# Altium PCB PCB1.PcbDoc
Units mm, origin at the board's own origin, x right, y up, seen from the top; angles counter-clockwise.
Board outline 102 x 99.82 mm, 2 copper layers (Top Layer, Bottom Layer); 155 components, 19 nets, 399 pads, 0 vias.
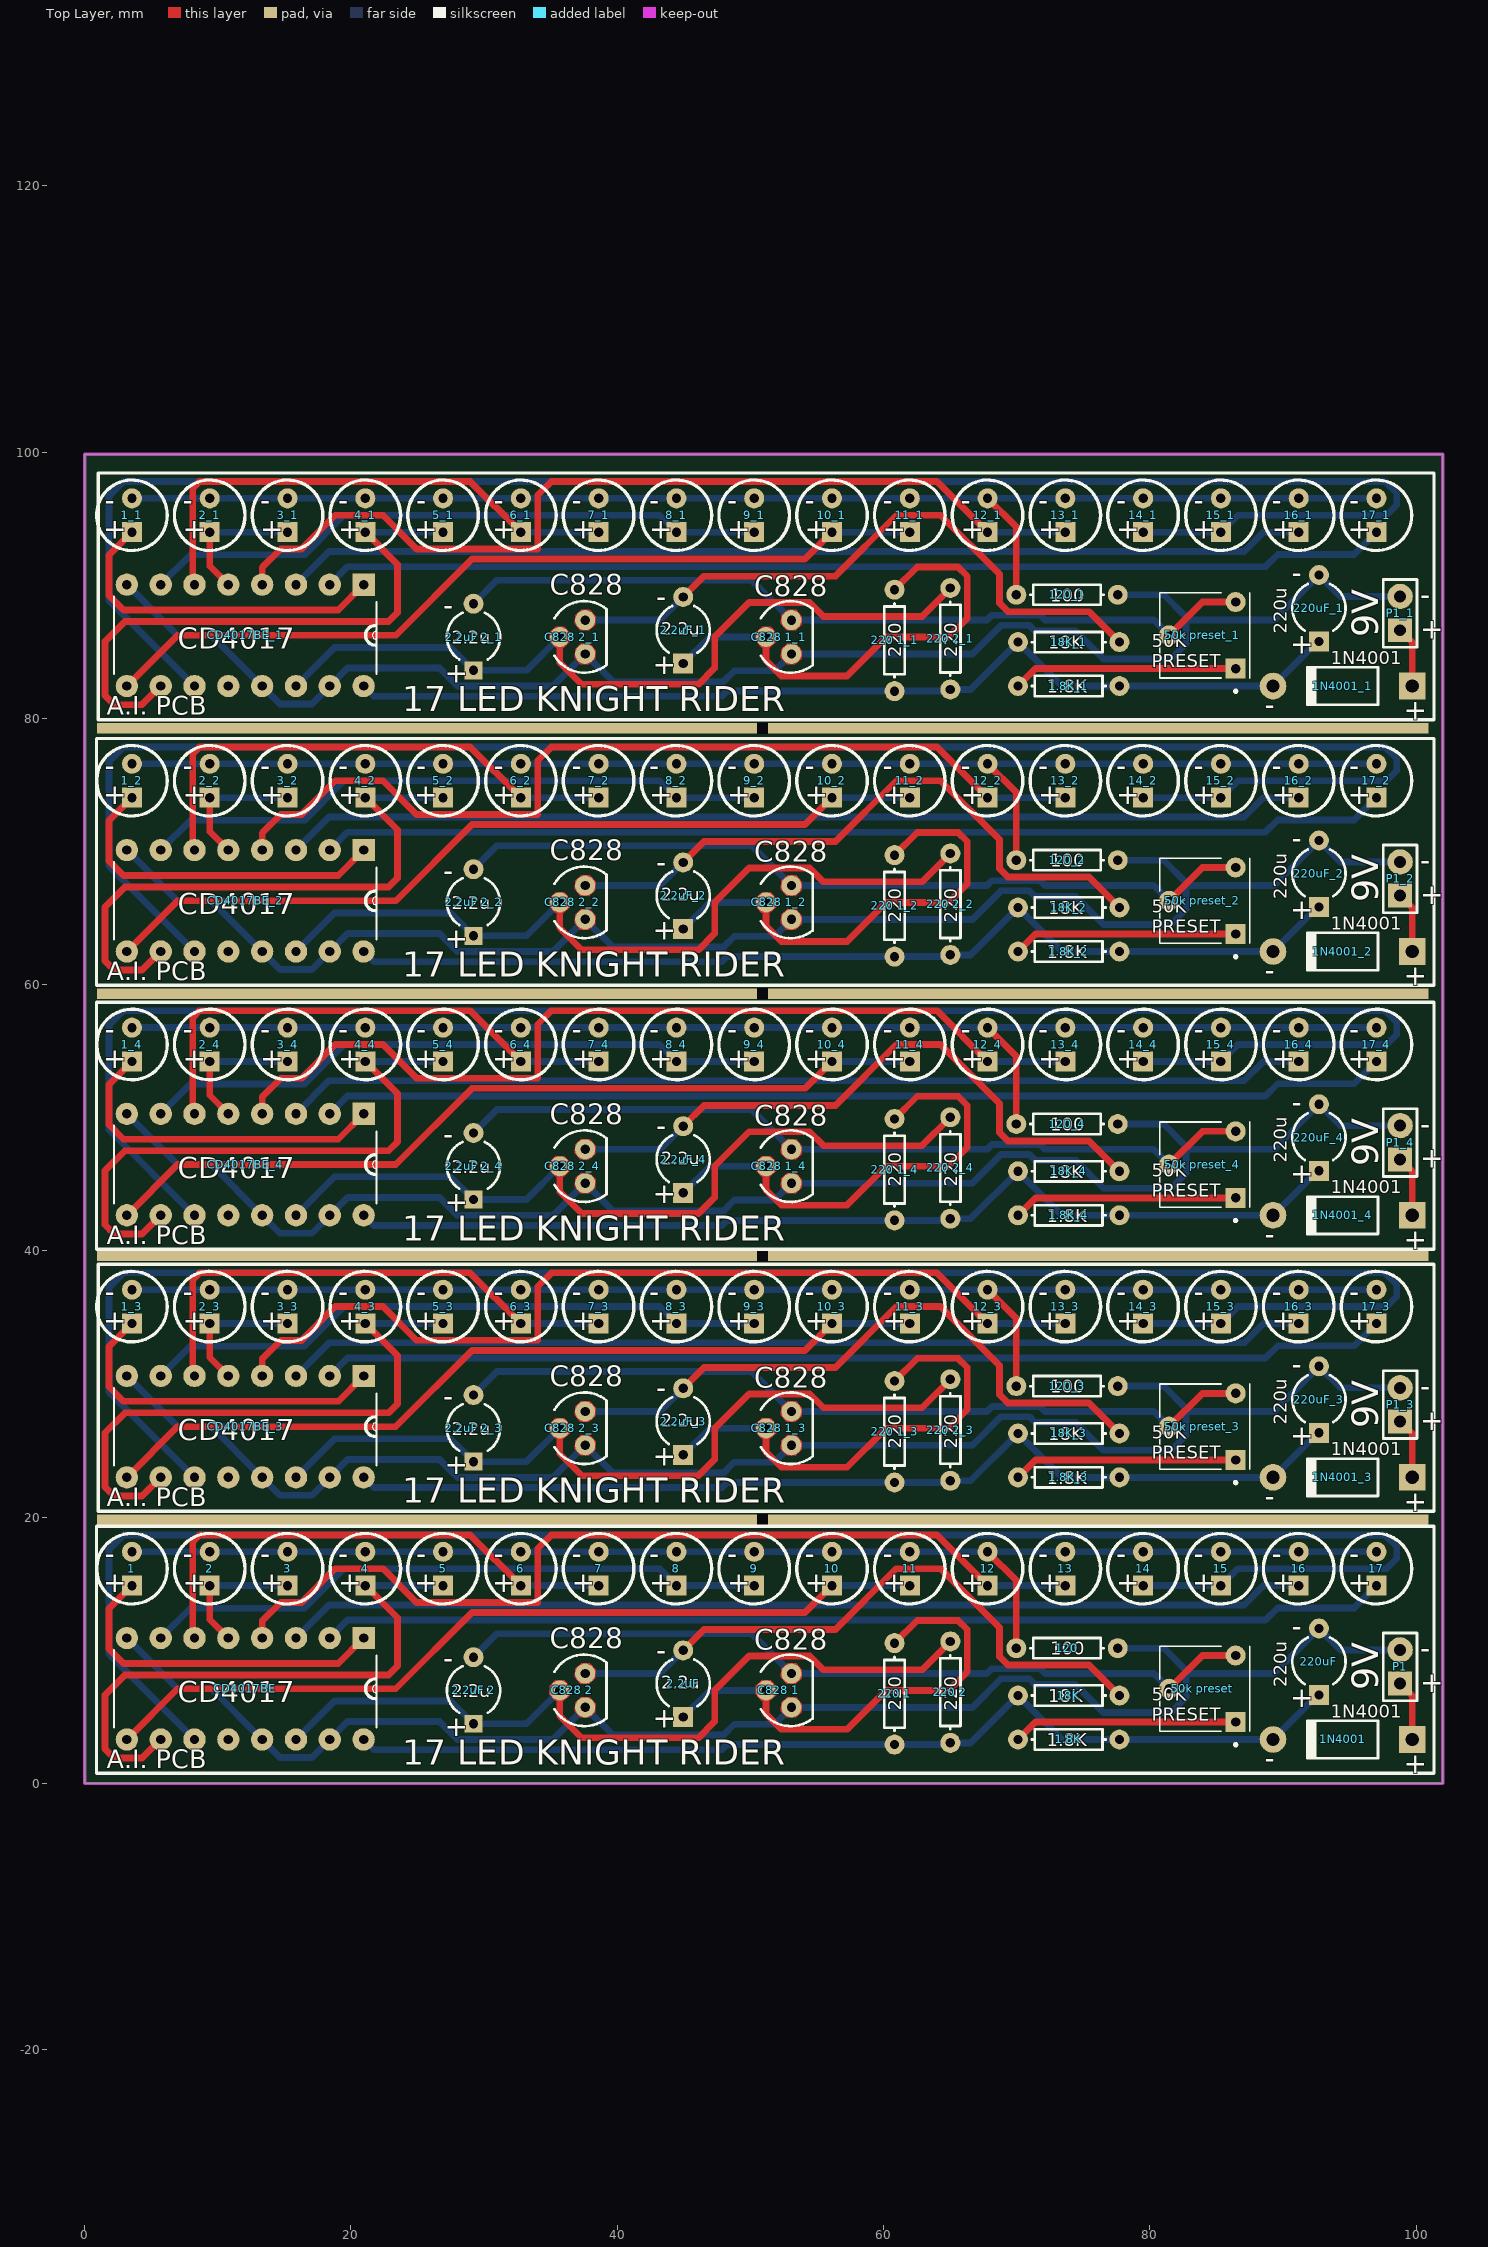
[diagram p0: Top Layer view]
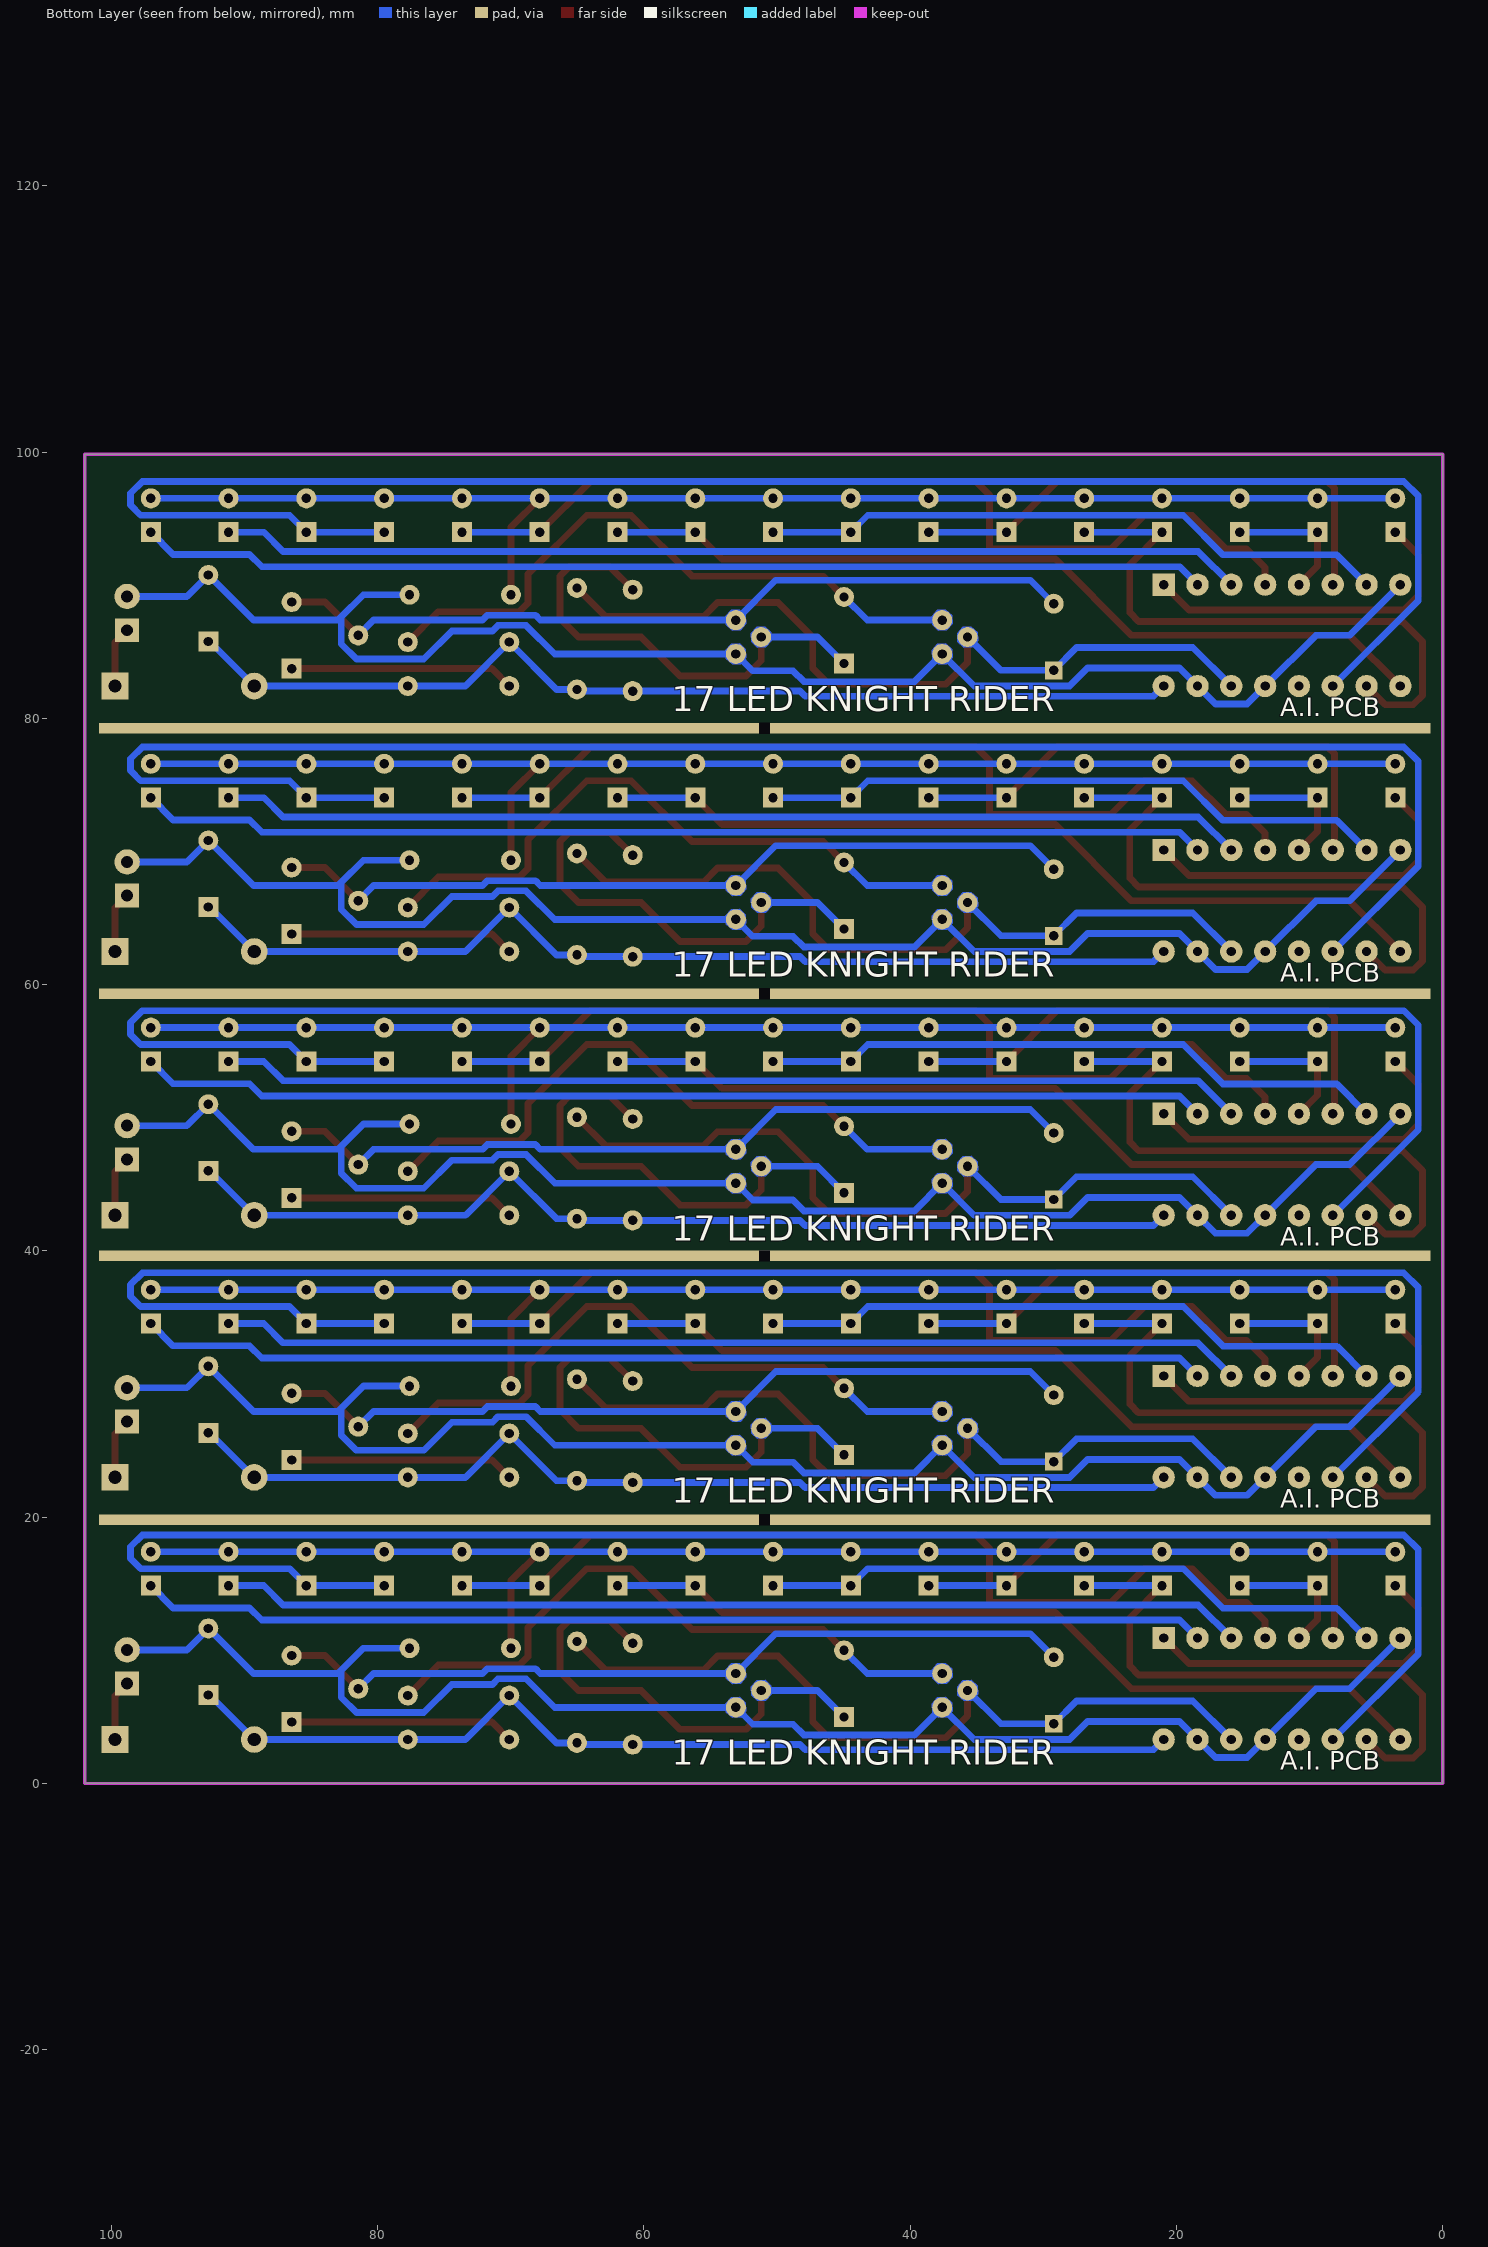
[diagram p1: Bottom Layer view, seen from below]

## Layer stack, top to bottom
Top Solder: solder mask 0.0102, Solder Resist, Dk 3.5
Top Layer: signal copper 0.0356
Dielectric 1: dielectric 0.32, FR-4, Dk 4.8
Bottom Layer: signal copper 0.0356
Bottom Solder: solder mask 0.0102, Solder Resist, Dk 3.5

## Board outline
0,0 0,99.822 102,99.822 102,0

## Design rules (kind name [scope] priority, off if disabled: settings)
Clearance [All] p1: gap=0.254 ignorepadtopadclearanceinfootprint=FALSE except(0: Arc-Hole Track-Hole SMDPad-Hole THPad-Hole Via-Hole Fill-Hole Poly-Hole Region-Hole Text-Hole)
PolygonConnect [All] p1: connectstyle=Relief reliefconductorwidth=0.254 reliefentries=4 polygonreliefangle="90 Angle" airgapwidth=0.254
RoutingVias [All] p1: holewidth=0.711 width=1.27 viastyle="Through Hole" minholewidth=0.711 minwidth=1.27 maxholewidth=0.711 maxwidth=1.27
SolderMaskExpansion [All] p1: expansion=0.102
Width [All] p1: maxlimit=0.762 minlimit=0.254 preferedwidth=0.508
30 further rules are at their usual default settings.

## Classes and differential pairs
component class Sheet1: 1 1.8K 1N4001 2 2.2uF "2.2uF 2" 3 4 5 6 7 8 9 10 11 12 13 14 15 16 17 18K "50k preset" 120 220 "220 1" "220 2" 220uF C828 "C828 1" "C828 2" CD4017BE P1 Q1 Q?

## Components (designator, comment, footprint, x,y, rotation, side; value= is the part's Value field where it differs from the comment)
1 "L-53GD" L-53GD 3.556,16.129 r90 top
1.8K "" AXIAL-0.3 73.914,3.302 r0 top value=1.8K
1.8K_1 "" AXIAL-0.3 73.914,82.423 r0 top value=1.8K (schematic designator 1.8K)
1.8K_2 "" AXIAL-0.3 73.914,62.484 r0 top value=1.8K (schematic designator 1.8K)
1.8K_3 "" AXIAL-0.3 73.914,22.987 r0 top value=1.8K (schematic designator 1.8K)
1.8K_4 "" AXIAL-0.3 73.914,42.672 r0 top value=1.8K (schematic designator 1.8K)
1_1 "L-53GD" L-53GD 3.556,95.25 r90 top (schematic designator 1)
1_2 "L-53GD" L-53GD 3.556,75.311 r90 top (schematic designator 1)
1_3 "L-53GD" L-53GD 3.556,35.814 r90 top (schematic designator 1)
1_4 "L-53GD" L-53GD 3.556,55.499 r90 top (schematic designator 1)
1N4001 "" DO-41 94.488,3.302 r180 top
1N4001_1 "" DO-41 94.488,82.423 r180 top (schematic designator 1N4001)
1N4001_2 "" DO-41 94.488,62.484 r180 top (schematic designator 1N4001)
1N4001_3 "" DO-41 94.488,22.987 r180 top (schematic designator 1N4001)
1N4001_4 "" DO-41 94.488,42.672 r180 top (schematic designator 1N4001)
2 "L-53GD" L-53GD 9.398,16.129 r90 top
2.2uF "" CAPR5-4X5#1 44.958,7.493 r90 top value="2.2uF 1"
"2.2uF 2" "" CAPR5-4X5#2 29.21,6.985 r90 top value=2.2uF
"2.2uF 2_1" "" CAPR5-4X5#2 29.21,86.106 r90 top value=2.2uF (schematic designator "2.2uF 2")
"2.2uF 2_2" "" CAPR5-4X5#2 29.21,66.167 r90 top value=2.2uF (schematic designator "2.2uF 2")
"2.2uF 2_3" "" CAPR5-4X5#2 29.21,26.67 r90 top value=2.2uF (schematic designator "2.2uF 2")
"2.2uF 2_4" "" CAPR5-4X5#2 29.21,46.355 r90 top value=2.2uF (schematic designator "2.2uF 2")
2.2uF_1 "" CAPR5-4X5#1 44.958,86.614 r90 top value="2.2uF 1" (schematic designator 2.2uF)
2.2uF_2 "" CAPR5-4X5#1 44.958,66.675 r90 top value="2.2uF 1" (schematic designator 2.2uF)
2.2uF_3 "" CAPR5-4X5#1 44.958,27.178 r90 top value="2.2uF 1" (schematic designator 2.2uF)
2.2uF_4 "" CAPR5-4X5#1 44.958,46.863 r90 top value="2.2uF 1" (schematic designator 2.2uF)
2_1 "L-53GD" L-53GD 9.398,95.25 r90 top (schematic designator 2)
2_2 "L-53GD" L-53GD 9.398,75.311 r90 top (schematic designator 2)
2_3 "L-53GD" L-53GD 9.398,35.814 r90 top (schematic designator 2)
2_4 "L-53GD" L-53GD 9.398,55.499 r90 top (schematic designator 2)
3 "L-53GD" L-53GD 15.24,16.129 r90 top
3_1 "L-53GD" L-53GD 15.24,95.25 r90 top (schematic designator 3)
3_2 "L-53GD" L-53GD 15.24,75.311 r90 top (schematic designator 3)
3_3 "L-53GD" L-53GD 15.24,35.814 r90 top (schematic designator 3)
3_4 "L-53GD" L-53GD 15.24,55.499 r90 top (schematic designator 3)
4 "L-53GD" L-53GD 21.082,16.129 r90 top
4_1 "L-53GD" L-53GD 21.082,95.25 r90 top (schematic designator 4)
4_2 "L-53GD" L-53GD 21.082,75.311 r90 top (schematic designator 4)
4_3 "L-53GD" L-53GD 21.082,35.814 r90 top (schematic designator 4)
4_4 "L-53GD" L-53GD 21.082,55.499 r90 top (schematic designator 4)
5 "L-53GD" L-53GD 26.924,16.129 r90 top
5_1 "L-53GD" L-53GD 26.924,95.25 r90 top (schematic designator 5)
5_2 "L-53GD" L-53GD 26.924,75.311 r90 top (schematic designator 5)
5_3 "L-53GD" L-53GD 26.924,35.814 r90 top (schematic designator 5)
5_4 "L-53GD" L-53GD 26.924,55.499 r90 top (schematic designator 5)
6 "L-53GD" L-53GD 32.766,16.129 r90 top
6_1 "L-53GD" L-53GD 32.766,95.25 r90 top (schematic designator 6)
6_2 "L-53GD" L-53GD 32.766,75.311 r90 top (schematic designator 6)
6_3 "L-53GD" L-53GD 32.766,35.814 r90 top (schematic designator 6)
6_4 "L-53GD" L-53GD 32.766,55.499 r90 top (schematic designator 6)
7 "L-53GD" L-53GD 38.608,16.129 r90 top
7_1 "L-53GD" L-53GD 38.608,95.25 r90 top (schematic designator 7)
7_2 "L-53GD" L-53GD 38.608,75.311 r90 top (schematic designator 7)
7_3 "L-53GD" L-53GD 38.608,35.814 r90 top (schematic designator 7)
7_4 "L-53GD" L-53GD 38.608,55.499 r90 top (schematic designator 7)
8 "L-53GD" L-53GD 44.45,16.129 r90 top
8_1 "L-53GD" L-53GD 44.45,95.25 r90 top (schematic designator 8)
8_2 "L-53GD" L-53GD 44.45,75.311 r90 top (schematic designator 8)
8_3 "L-53GD" L-53GD 44.45,35.814 r90 top (schematic designator 8)
8_4 "L-53GD" L-53GD 44.45,55.499 r90 top (schematic designator 8)
9 "L-53GD" L-53GD 50.292,16.129 r90 top
9_1 "L-53GD" L-53GD 50.292,95.25 r90 top (schematic designator 9)
9_2 "L-53GD" L-53GD 50.292,75.311 r90 top (schematic designator 9)
9_3 "L-53GD" L-53GD 50.292,35.814 r90 top (schematic designator 9)
9_4 "L-53GD" L-53GD 50.292,55.499 r90 top (schematic designator 9)
10 "L-53GD" L-53GD 56.134,16.129 r90 top
10_1 "L-53GD" L-53GD 56.134,95.25 r90 top (schematic designator 10)
10_2 "L-53GD" L-53GD 56.134,75.311 r90 top (schematic designator 10)
10_3 "L-53GD" L-53GD 56.134,35.814 r90 top (schematic designator 10)
10_4 "L-53GD" L-53GD 56.134,55.499 r90 top (schematic designator 10)
11 "L-53GD" L-53GD 61.976,16.129 r90 top
11_1 "L-53GD" L-53GD 61.976,95.25 r90 top (schematic designator 11)
11_2 "L-53GD" L-53GD 61.976,75.311 r90 top (schematic designator 11)
11_3 "L-53GD" L-53GD 61.976,35.814 r90 top (schematic designator 11)
11_4 "L-53GD" L-53GD 61.976,55.499 r90 top (schematic designator 11)
12 "L-53GD" L-53GD 67.818,16.129 r90 top
12_1 "L-53GD" L-53GD 67.818,95.25 r90 top (schematic designator 12)
12_2 "L-53GD" L-53GD 67.818,75.311 r90 top (schematic designator 12)
12_3 "L-53GD" L-53GD 67.818,35.814 r90 top (schematic designator 12)
12_4 "L-53GD" L-53GD 67.818,55.499 r90 top (schematic designator 12)
13 "L-53GD" L-53GD 73.66,16.129 r90 top
13_1 "L-53GD" L-53GD 73.66,95.25 r90 top (schematic designator 13)
13_2 "L-53GD" L-53GD 73.66,75.311 r90 top (schematic designator 13)
13_3 "L-53GD" L-53GD 73.66,35.814 r90 top (schematic designator 13)
13_4 "L-53GD" L-53GD 73.66,55.499 r90 top (schematic designator 13)
14 "L-53GD" L-53GD 79.502,16.129 r90 top
14_1 "L-53GD" L-53GD 79.502,95.25 r90 top (schematic designator 14)
14_2 "L-53GD" L-53GD 79.502,75.311 r90 top (schematic designator 14)
14_3 "L-53GD" L-53GD 79.502,35.814 r90 top (schematic designator 14)
14_4 "L-53GD" L-53GD 79.502,55.499 r90 top (schematic designator 14)
15 "L-53GD" L-53GD 85.344,16.129 r90 top
15_1 "L-53GD" L-53GD 85.344,95.25 r90 top (schematic designator 15)
15_2 "L-53GD" L-53GD 85.344,75.311 r90 top (schematic designator 15)
15_3 "L-53GD" L-53GD 85.344,35.814 r90 top (schematic designator 15)
15_4 "L-53GD" L-53GD 85.344,55.499 r90 top (schematic designator 15)
16 "L-53GD" L-53GD 91.186,16.129 r90 top
16_1 "L-53GD" L-53GD 91.186,95.25 r90 top (schematic designator 16)
16_2 "L-53GD" L-53GD 91.186,75.311 r90 top (schematic designator 16)
16_3 "L-53GD" L-53GD 91.186,35.814 r90 top (schematic designator 16)
16_4 "L-53GD" L-53GD 91.186,55.499 r90 top (schematic designator 16)
17 "L-53GD" L-53GD 97.028,16.129 r90 top
17_1 "L-53GD" L-53GD 97.028,95.25 r90 top (schematic designator 17)
17_2 "L-53GD" L-53GD 97.028,75.311 r90 top (schematic designator 17)
17_3 "L-53GD" L-53GD 97.028,35.814 r90 top (schematic designator 17)
17_4 "L-53GD" L-53GD 97.028,55.499 r90 top (schematic designator 17)
18K "" AXIAL-0.3 73.914,6.604 r180 top value=18K
18K_1 "" AXIAL-0.3 73.914,85.725 r180 top value=18K (schematic designator 18K)
18K_2 "" AXIAL-0.3 73.914,65.786 r180 top value=18K (schematic designator 18K)
18K_3 "" AXIAL-0.3 73.914,26.289 r180 top value=18K (schematic designator 18K)
18K_4 "" AXIAL-0.3 73.914,45.974 r180 top value=18K (schematic designator 18K)
"50k preset" "50K" *TRIM_EVN-D8AA03B14 83.947,7.112 r90 top
"50k preset_1" "50K" *TRIM_EVN-D8AA03B14 83.947,86.233 r90 top (schematic designator "50k preset")
"50k preset_2" "50K" *TRIM_EVN-D8AA03B14 83.947,66.294 r90 top (schematic designator "50k preset")
"50k preset_3" "50K" *TRIM_EVN-D8AA03B14 83.947,26.797 r90 top (schematic designator "50k preset")
"50k preset_4" "50K" *TRIM_EVN-D8AA03B14 83.947,46.482 r90 top (schematic designator "50k preset")
120 "" AXIAL-0.3 73.787,10.16 r0 top value=220
120_1 "" AXIAL-0.3 73.787,89.281 r0 top value=220 (schematic designator 120)
120_2 "" AXIAL-0.3 73.787,69.342 r0 top value=220 (schematic designator 120)
120_3 "" AXIAL-0.3 73.787,29.845 r0 top value=220 (schematic designator 120)
120_4 "" AXIAL-0.3 73.787,49.53 r0 top value=220 (schematic designator 120)
"220 1" "" AXIAL-0.3 60.833,6.731 r270 top value=220
"220 1_1" "" AXIAL-0.3 60.833,85.852 r270 top value=220 (schematic designator "220 1")
"220 1_2" "" AXIAL-0.3 60.833,65.913 r270 top value=220 (schematic designator "220 1")
"220 1_3" "" AXIAL-0.3 60.833,26.416 r270 top value=220 (schematic designator "220 1")
"220 1_4" "" AXIAL-0.3 60.833,46.101 r270 top value=220 (schematic designator "220 1")
"220 2" "" AXIAL-0.3 65.024,6.858 r90 top value=220
"220 2_1" "" AXIAL-0.3 65.024,85.979 r90 top value=220 (schematic designator "220 2")
"220 2_2" "" AXIAL-0.3 65.024,66.04 r90 top value=220 (schematic designator "220 2")
"220 2_3" "" AXIAL-0.3 65.024,26.543 r90 top value=220 (schematic designator "220 2")
"220 2_4" "" AXIAL-0.3 65.024,46.228 r90 top value=220 (schematic designator "220 2")
220uF "" CAPR5-4X5#1 92.71,9.144 r90 top value=100pF
220uF_1 "" CAPR5-4X5#1 92.71,88.265 r90 top value=100pF (schematic designator 220uF)
220uF_2 "" CAPR5-4X5#1 92.71,68.326 r90 top value=100pF (schematic designator 220uF)
220uF_3 "" CAPR5-4X5#1 92.71,28.829 r90 top value=100pF (schematic designator 220uF)
220uF_4 "" CAPR5-4X5#1 92.71,48.514 r90 top value=100pF (schematic designator 220uF)
"C828 1" "P2N2222A" *TO92 53.086,6.985 r90 top
"C828 1_1" "P2N2222A" *TO92 53.086,86.106 r90 top (schematic designator "C828 1")
"C828 1_2" "P2N2222A" *TO92 53.086,66.167 r90 top (schematic designator "C828 1")
"C828 1_3" "P2N2222A" *TO92 53.086,26.67 r90 top (schematic designator "C828 1")
"C828 1_4" "P2N2222A" *TO92 53.086,46.355 r90 top (schematic designator "C828 1")
"C828 2" "P2N2222A" *TO92 37.592,6.985 r90 top
"C828 2_1" "P2N2222A" *TO92 37.592,86.106 r90 top (schematic designator "C828 2")
"C828 2_2" "P2N2222A" *TO92 37.592,66.167 r90 top (schematic designator "C828 2")
"C828 2_3" "P2N2222A" *TO92 37.592,26.67 r90 top (schematic designator "C828 2")
"C828 2_4" "P2N2222A" *TO92 37.592,46.355 r90 top (schematic designator "C828 2")
CD4017BE "CD4017BE" *DIP254P762X508-16 3.175,3.302 r270 top
CD4017BE_1 "CD4017BE" *DIP254P762X508-16 3.175,82.423 r270 top (schematic designator CD4017BE)
CD4017BE_2 "CD4017BE" *DIP254P762X508-16 3.175,62.484 r270 top (schematic designator CD4017BE)
CD4017BE_3 "CD4017BE" *DIP254P762X508-16 3.175,22.987 r270 top (schematic designator CD4017BE)
CD4017BE_4 "CD4017BE" *DIP254P762X508-16 3.175,42.672 r270 top (schematic designator CD4017BE)
P1 "" HDR1X2 98.806,7.493 r90 top
P1_1 "" HDR1X2 98.806,86.614 r90 top (schematic designator P1)
P1_2 "" HDR1X2 98.806,66.675 r90 top (schematic designator P1)
P1_3 "" HDR1X2 98.806,27.178 r90 top (schematic designator P1)
P1_4 "" HDR1X2 98.806,46.863 r90 top (schematic designator P1)

## Footprints (in the part's own frame and the unit in brackets; to place one, negate y for a bottom-side part, rotate by r counter-clockwise, add the part's x,y. Pads: shape width x height; smd on the part's side, far side on the other; paste and mask are expansions set on the pad)
*DIP254P762X508-16 [mil]
  rect 66x66 hole 27.56: 1(-300,700)
  round 66 hole 27.56: 2(-300,600) 3(-300,500) 4(-300,400) 5(-300,300) 6(-300,200) 7(-300,100) 8(-300,0) 9(0,0) 10(0,100) 11(0,200) 12(0,300) 13(0,400) 14(0,500) 15(0,600) 16(0,700)
  silkscreen extent -265,-38 -35,738
*TO92 [mm]
  round 1.5 hole 0.7: 1(1.27,0) 2(0,1.905) 3(-1.27,0)
  Top Layer region: 2.058,0.287 1.624,0.76 0.983,0.788 0.51,0.354 0.482,-0.287 0.916,-0.76 1.557,-0.788 2.03,-0.354
  Top Layer region: 0.788,2.192 0.354,2.665 -0.287,2.693 -0.76,2.259 -0.788,1.618 -0.354,1.145 0.287,1.117 0.76,1.551
  Top Layer region: -0.482,0.287 -0.916,0.76 -1.557,0.788 -2.03,0.354 -2.058,-0.287 -1.624,-0.76 -0.983,-0.788 -0.51,-0.354
  Bottom Layer region: 2.058,0.287 1.624,0.76 0.983,0.788 0.51,0.354 0.482,-0.287 0.916,-0.76 1.557,-0.788 2.03,-0.354
  Bottom Layer region: 0.788,2.192 0.354,2.665 -0.287,2.693 -0.76,2.259 -0.788,1.618 -0.354,1.145 0.287,1.117 0.76,1.551
  Bottom Layer region: -0.482,0.287 -0.916,0.76 -1.557,0.788 -2.03,0.354 -2.058,-0.287 -1.624,-0.76 -0.983,-0.788 -0.51,-0.354
  Multi-Layer region: 2.058,0.287 1.624,0.76 0.983,0.788 0.51,0.354 0.482,-0.287 0.916,-0.76 1.557,-0.788 2.03,-0.354
  Multi-Layer region: 0.788,2.192 0.354,2.665 -0.287,2.693 -0.76,2.259 -0.788,1.618 -0.354,1.145 0.287,1.117 0.76,1.551
  Multi-Layer region: -0.482,0.287 -0.916,0.76 -1.557,0.788 -2.03,0.354 -2.058,-0.287 -1.624,-0.76 -0.983,-0.788 -0.51,-0.354
  silkscreen extent -2.68,-1.61 2.7,2.3
*TRIM_EVN-D8AA03B14 [mm]
  rect 1.508x1.508 hole 0.7: 1(-2.5,-2.5)
  round 1.508 hole 0.7: 2(0,2.5) 3(2.5,-2.5)
  silkscreen extent -4.3,-3.57 3.2,3.2
AXIAL-0.3 [mm] "Axial Device, Thru-Hole; 2 Leads; 0.3 in Pin Spacing"
  round 1.5 hole 0.7: 1(-3.81,0) 2(3.81,0)
  silkscreen extent -2.77,-0.76 2.77,0.76
CAPR5-4X5#1 [mm] "Capacitor; 2 Leads"
  rect 1.5x1.5 hole 0.7: 1(-2.5,0)
  round 1.5 hole 0.7: 2(2.5,0)
  silkscreen extent -1.69,-2 1.82,2
CAPR5-4X5#2 [mm] "Capacitor; 2 Leads"
  rect 1.35x1.35 hole 0.7: 1(-2.5,0)
  round 1.5 hole 0.7: 2(2.5,0)
  silkscreen extent -1.69,-2 1.82,2
DO-41 [mm] "Diode, Axial; Body 5.2 x 2.7 mm (LxDia. max), Lead Dia. 0.86 mm (max)"
  rect 2x2 hole 1: 1(-5.23,0)
  round 2 hole 1: 2(5.23,0)
  silkscreen extent -2.65,-1.4 2.75,1.4
HDR1X2 [mm] "Connector; Header; 2 Position"
  rect 1.8x1.8 hole 0.9: 1(0,0)
  round 1.9 hole 0.9: 2(2.54,0)
  silkscreen extent -1.27,-1.27 3.81,1.27
L-53GD [mm]
  rect 1.5x1.5 hole 0.7: 1(-1.27,0)
  round 1.5 hole 0.7: 2(1.27,0)
  silkscreen extent -2.65,-2.65 2.65,2.65

## Part data
1 1_1 1_2 1_3 1_4 2 2_1 2_2 2_3 2_4 3 3_1 3_2 3_3 3_4 4 4_1 4_2 4_3 4_4 5 5_1 5_2 5_3 5_4 6 6_1 6_2 6_3 6_4 7 7_1 7_2 7_3 7_4 8 8_1 8_2 8_3 8_4 9 9_1 9_2 9_3 9_4 10 10_1 10_2 10_3 10_4 11 11_1 11_2 11_3 11_4 12 12_1 12_2 12_3 12_4 13 13_1 13_2 13_3 13_4 14 14_1 14_2 14_3 14_4 15 15_1 15_2 15_3 15_4 16 16_1 16_2 16_3 16_4 17 17_1 17_2 17_3 17_4: "LED", Manufacturer_Name=Kingbright, Mouser Part Number=N/A, RS Part Number=2286004A, Allied_Number=70424261, Allied Price/Stock=http://www.alliedelec.com/kingbright-l-53gd/70424261/, Datasheet Link=http://docs-emea.rs-online.com/webdocs/151e/0900766b8151e408.pdf, Manufacturer_Part_Number=L-53GD, Mouser Price/Stock=https://www.mouser.com/Search/Refine.aspx?Keyword=N%2FA, RS Price/Stock=http://uk.rs-online.com/web/p/products/2286004A
1.8K 1.8K_1 1.8K_2 1.8K_3 1.8K_4 18K 18K_1 18K_2 18K_3 18K_4 120 120_1 120_2 120_3 120_4 "220 1" "220 1_1" "220 1_2" "220 1_3" "220 1_4" "220 2" "220 2_1" "220 2_2" "220 2_3" "220 2_4": library part Res1, "Resistor", LatestRevisionDate=17-Jul-2002, LatestRevisionNote="Re-released for DXP Platform.", PackageDescription="Axial Device, Thru-Hole; 2 Leads; 0.3 in Pin Spacing", PackageReference=AXIAL-0.3, Published=8-Jun-2000, Publisher="Altium Limited"
1N4001 1N4001_1 1N4001_2 1N4001_3 1N4001_4: library part "Diode 1N4001", "1 Amp General Purpose Rectifier", Code_JEDEC=DO-204-AL, ComponentLink1Description="Manufacturer Link", ComponentLink1URL=http://www.fairchildsemi.com/, ComponentLink2Description=Datasheet, ComponentLink2URL=http://www.fairchildsemi.com/ds/1N%2F1N4001.pdf, DatasheetVersion=1998, LatestRevisionDate=17-Jul-2002, LatestRevisionNote="Re-released for DXP Platform.", PackageDescription="Diode, Axial; Body 5.2 x 2.7 mm (LxDia. max), Lead Dia. 0.86 mm (max)", PackageReference=DO-41, PackageVersion=Aug-1999, Published=8-Jun-2000, Publisher="Altium Limited"
2.2uF "2.2uF 2" "2.2uF 2_1" "2.2uF 2_2" "2.2uF 2_3" "2.2uF 2_4" 2.2uF_1 2.2uF_2 2.2uF_3 2.2uF_4 220uF 220uF_1 220uF_2 220uF_3 220uF_4: library part Cap2, "Capacitor", PackageDescription="Capacitor; 2 Leads", PackageReference=CAPR5-4X5, Published=23-Sep-2002, Publisher="Altium Limited"
"50k preset" "50k preset_1" "50k preset_2" "50k preset_3" "50k preset_4": library part EVN-D8AA03B14, "Trimmer; Carbon; Rest 10 Kilohms; PCB; 1 Turn; Pwr-Rtg 0.1 W; Linear; Top Adj; 6 mm SQ", Package="PQFP-44 Panasonic", Availability=Unavailable, MF="Panasonic Electronic", MP=EVN-D8AA03B14, Price=None, SnapEDA_Link=https://www.snapeda.com/parts/EVN-D8AA03B14/Panasonic%20Electronic%20Components/view-part/?ref=snap
"C828 1" "C828 1_1" "C828 1_2" "C828 1_3" "C828 1_4" "C828 2" "C828 2_1" "C828 2_2" "C828 2_3" "C828 2_4": Package="TO-92 NXP Semiconductors", Availability=Unavailable, MF="ON Semiconductor", MP=P2N2222A, Price=None, SnapEDA_Link=https://www.snapeda.com/parts/P2N2222A/ON%20Semiconductor/view-part/?ref=snap
CD4017BE CD4017BE_1 CD4017BE_2 CD4017BE_3 CD4017BE_4: "IC Mos 4017/CD4017BE HARRIS", Package="DIP-16 Intersil", Availability=Unavailable, MF=Texas, MP=CD4017BE, Price=None, SnapEDA_Link=https://www.snapeda.com/parts/CD4017BE/Texas%20Instruments/view-part/?ref=snap
P1 P1_1 P1_2 P1_3 P1_4: library part "Header 2", "Header, 2-Pin", LatestRevisionDate=17-Jul-2002, LatestRevisionNote="Re-released for DXP Platform.", Publisher="Altium Limited"

## Free pads (board coordinates)
  rect 100x0.8 hole 0.8 square: 36(50.927,19.812) 36(50.927,39.624) 36(50.927,59.309) 36(50.927,79.248)

## Nets (pads, with @x,y where several pads share a name; then routed paths per layer and width w, separated by ;. In a path a pad name is that pad's centre, name@x,y a point inside that pad or via, vN(x,y) a via of type N, cw(c..) or ccw(c..) an arc to the next point about the centre after c; other vN are vias at no path point)
Net1.8K_1: 1.8K.1 "50k preset.1" | length 16.9
  Top Layer w0.508: 1.8K.1 71.414,4.612 86.447,4.612
Net1.8K_2: 1.8K.2 1N4001.2 18K.2 220uF.1 "220 1.2" "220 2.1" CD4017BE.16 | length 76.5
  Bottom Layer w0.508: CD4017BE.16 21.717,2.54 47.879,2.54 48.26,2.921 60.833,2.921 64.897,2.921 65.024,3.048 66.548,3.048 18K.2 73.406,3.302 1.8K.2 1N4001.2 92.6,6.644 220uF.1
Net1_1: 1.1 CD4017BE.1 | length 25.8
  Top Layer w0.508: 1.1 1.829,13.132 1.829,10.109 2.921,9.017 19.05,9.017 CD4017BE.1
Net1_2: 1.2 2.2 3.2 4.2 5.2 6.2 7.2 8.2 9.2 10.2 11.2 12.2 13.2 14.2 15.2 16.2 17.2 120.1 | length 101.6
  Top Layer w0.508: 12.2 69.977,15.24 120.1
  Bottom Layer w0.508: 1.2 2.2 3.2 4.2 5.2 6.2 7.2 8.2 9.2 10.2 11.2 12.2 13.2 14.2 15.2 16.2 17.2
Net1N4001_1: 1N4001.1 P1.1 | length 4.6
  Top Layer w0.508: P1.1 99.718,6.581 1N4001.1
"Net2.2uF 2_1": "2.2uF 2.1" "220 2.2" "C828 2.2" CD4017BE.14 | length 59.9
  Top Layer w0.508: 35.687,6.985 35.687,5.08 37.338,3.429 46.101,3.429 47.32,4.648 47.32,6.985 49.911,9.576 54.458,9.576 55.499,8.534 62.89,8.534 65.024,10.668
  Bottom Layer w0.508: CD4017BE.14 18.771,6.198 27.497,6.198 29.21,4.485 33.187,4.485 35.687,6.985
"Net2.2uF 2_2": "2.2uF 2.2" "50k preset.2" "50k preset.3" "C828 1.1" | length 61
  Top Layer w0.508: 81.447,7.112 83.947,9.612 86.447,9.612
  Bottom Layer w0.508: 29.21,9.485 30.977,11.252 50.089,11.252 53.086,8.255 67.779,8.255 68.148,8.624 71.755,8.624 72.124,8.255 80.304,8.255 81.447,7.112
Net2.2uF_1: 2.2uF.1 "220 1.1" "C828 1.2" | length 35.8
  Top Layer w0.508: 51.181,6.985 51.181,5.207 52.324,4.064 57.277,4.064 60.198,6.985 64.897,6.985 66.294,8.382 66.294,11.557 65.608,12.243 62.535,12.243 60.833,10.541
  Bottom Layer w0.508: 2.2uF.1 46.95,6.985 51.181,6.985
Net2.2uF_2: 2.2uF.2 18K.1 "C828 2.1" | length 48.6
  Top Layer w0.508: 2.2uF.2 46.522,11.557 56.388,11.557 60.96,16.129 64.287,16.129 68.707,11.709 68.707,9.525 69.342,8.89 75.438,8.89 18K.1
  Bottom Layer w0.508: 37.592,8.255 43.22,8.255 2.2uF.2
Net2_1: 2.1 3.1 CD4017BE.5 | length 10.4
  Top Layer w0.508: 2.1 9.398,12.319 CD4017BE.5
  Bottom Layer w0.508: 2.1 3.1
Net4_1: 4.1 5.1 CD4017BE.10 | length 44.9
  Top Layer w0.508: CD4017BE.10 4.318,1.905 2.21,1.905 1.524,2.591 1.524,6.655 3.023,8.153 22.835,8.153 23.495,8.814 23.495,12.446 4.1
  Bottom Layer w0.508: 4.1 5.1
Net6_1: 6.1 7.1 CD4017BE.6 | length 39.6
  Top Layer w0.508: CD4017BE.6 8.128,10.922 8.128,18.161 8.636,18.669 28.956,18.669 6.1
  Bottom Layer w0.508: 6.1 7.1
Net8_1: 8.1 9.1 CD4017BE.7 | length 47.3
  Bottom Layer w0.508: CD4017BE.7 7.95,13.157 16.51,13.157 19.482,16.129 43.18,16.129 8.1 9.1
Net10_1: 10.1 11.1 CD4017BE.9 | length 63.6
  Top Layer w0.508: CD4017BE.9 6.985,7.112 23.368,7.112 29.095,12.839 54.114,12.839 10.1
  Bottom Layer w0.508: 10.1 11.1
Net12_1: 12.1 13.1 CD4017BE.4 | length 70.3
  Top Layer w0.508: CD4017BE.4 13.335,12.192 14.732,13.589 16.281,13.589 18.821,16.129 22.403,16.129 24.931,13.601 34.036,13.601 34.036,17.653 35.052,18.669 64.008,18.669 12.1
  Bottom Layer w0.508: 12.1 13.1
Net14_1: 14.1 15.1 CD4017BE.11 | length 135.3
  Bottom Layer w0.508: CD4017BE.11 1.829,9.728 1.829,17.577 2.921,18.669 97.663,18.669 98.552,17.78 98.552,16.891 97.79,16.129 86.614,16.129 15.1 14.1
Net16_1: 16.1 CD4017BE.3 | length 76.9
  Bottom Layer w0.508: CD4017BE.3 18.364,13.411 87.097,13.411 88.544,14.859 16.1
Net17_1: 17.1 CD4017BE.2 | length 80.2
  Bottom Layer w0.508: CD4017BE.2 19.761,12.268 88.697,12.268 89.611,13.183 95.352,13.183 17.1
Net120_2: 120.2 220uF.2 "C828 1.3" "C828 2.3" CD4017BE.8 CD4017BE.13 CD4017BE.15 P1.2 | length 116.2
  Bottom Layer w0.508: CD4017BE.8 6.985,7.112 9.525,7.112 CD4017BE.13 14.681,1.956 17.069,1.956 CD4017BE.15 19.761,4.648 26.67,4.648 28.016,3.302 35.179,3.302 37.592,5.715 39.675,3.632 47.981,3.632 48.793,4.445 51.816,4.445 53.086,5.715 66.687,5.715 68.834,7.862 70.954,7.862 71.374,7.442 74.422,7.442 76.53,5.334 81.585,5.334 82.728,6.477 82.728,8.484 ; 120.2 81.051,10.16 82.728,8.484 ; P1.2 94.321,10.033 220uF.2 89.321,8.255 82.956,8.255 82.728,8.484
pads on no net: 1.8K_1.1 1.8K_1.2 1.8K_2.1 1.8K_2.2 1.8K_3.1 1.8K_3.2 1.8K_4.1 1.8K_4.2 1_1.1 1_1.2 1_2.1 1_2.2 1_3.1 1_3.2 1_4.1 1_4.2 1N4001_1.1 1N4001_1.2 1N4001_2.1 1N4001_2.2 1N4001_3.1 1N4001_3.2 1N4001_4.1 1N4001_4.2 2.2uF_1.1 2.2uF_1.2 2.2uF_2.1 2.2uF_2.2 2.2uF_3.1 2.2uF_3.2 2.2uF_4.1 2.2uF_4.2 2_1.1 2_1.2 2_2.1 2_2.2 2_3.1 2_3.2 2_4.1 2_4.2 3_1.1 3_1.2 3_2.1 3_2.2 3_3.1 3_3.2 3_4.1 3_4.2 4_1.1 4_1.2 4_2.1 4_2.2 4_3.1 4_3.2 4_4.1 4_4.2 5_1.1 5_1.2 5_2.1 5_2.2 5_3.1 5_3.2 5_4.1 5_4.2 6_1.1 6_1.2 6_2.1 6_2.2 6_3.1 6_3.2 6_4.1 6_4.2 7_1.1 7_1.2 7_2.1 7_2.2 7_3.1 7_3.2 7_4.1 7_4.2 8_1.1 8_1.2 8_2.1 8_2.2 8_3.1 8_3.2 8_4.1 8_4.2 9_1.1 9_1.2 9_2.1 9_2.2 9_3.1 9_3.2 9_4.1 9_4.2 10_1.1 10_1.2 10_2.1 10_2.2 10_3.1 10_3.2 10_4.1 10_4.2 11_1.1 11_1.2 11_2.1 11_2.2 11_3.1 11_3.2 11_4.1 11_4.2 12_1.1 12_1.2 12_2.1 12_2.2 12_3.1 12_3.2 12_4.1 12_4.2 13_1.1 13_1.2 13_2.1 13_2.2 13_3.1 13_3.2 13_4.1 13_4.2 14_1.1 14_1.2 14_2.1 14_2.2 14_3.1 14_3.2 14_4.1 14_4.2 15_1.1 15_1.2 15_2.1 15_2.2 15_3.1 15_3.2 15_4.1 15_4.2 16_1.1 16_1.2 16_2.1 16_2.2 16_3.1 16_3.2 16_4.1 16_4.2 17_1.1 17_1.2 17_2.1 17_2.2 17_3.1 17_3.2 17_4.1 17_4.2 18K_1.1 18K_1.2 18K_2.1 18K_2.2 18K_3.1 18K_3.2 18K_4.1 18K_4.2 120_1.1 120_1.2 120_2.1 120_2.2 120_3.1 120_3.2 120_4.1 120_4.2 220uF_1.1 220uF_1.2 220uF_2.1 220uF_2.2 220uF_3.1 220uF_3.2 220uF_4.1 220uF_4.2 "2.2uF 2_1.1" "2.2uF 2_1.2" "2.2uF 2_2.1" "2.2uF 2_2.2" "2.2uF 2_3.1" "2.2uF 2_3.2" "2.2uF 2_4.1" "2.2uF 2_4.2" "50k preset_1.1" "50k preset_1.2" "50k preset_1.3" "50k preset_2.1" "50k preset_2.2" "50k preset_2.3" "50k preset_3.1" "50k preset_3.2" "50k preset_3.3" "50k preset_4.1" "50k preset_4.2" "50k preset_4.3" "220 1_1.1" "220 1_1.2" "220 1_2.1" "220 1_2.2" "220 1_3.1" "220 1_3.2" "220 1_4.1" "220 1_4.2" "220 2_1.1" "220 2_1.2" "220 2_2.1" "220 2_2.2" "220 2_3.1" "220 2_3.2" "220 2_4.1" "220 2_4.2" "C828 1_1.1" "C828 1_1.2" "C828 1_1.3" "C828 1_2.1" "C828 1_2.2" "C828 1_2.3" "C828 1_3.1" "C828 1_3.2" "C828 1_3.3" "C828 1_4.1" "C828 1_4.2" "C828 1_4.3" "C828 2_1.1" "C828 2_1.2" "C828 2_1.3" "C828 2_2.1" "C828 2_2.2" "C828 2_2.3" "C828 2_3.1" "C828 2_3.2" "C828 2_3.3" "C828 2_4.1" "C828 2_4.2" "C828 2_4.3" CD4017BE.12 CD4017BE_1.1 CD4017BE_1.2 CD4017BE_1.3 CD4017BE_1.4 CD4017BE_1.5 CD4017BE_1.6 CD4017BE_1.7 CD4017BE_1.8 CD4017BE_1.9 CD4017BE_1.10 CD4017BE_1.11 CD4017BE_1.12 CD4017BE_1.13 CD4017BE_1.14 CD4017BE_1.15 CD4017BE_1.16 CD4017BE_2.1 CD4017BE_2.2 CD4017BE_2.3 CD4017BE_2.4 CD4017BE_2.5 CD4017BE_2.6 CD4017BE_2.7 CD4017BE_2.8 CD4017BE_2.9 CD4017BE_2.10 CD4017BE_2.11 CD4017BE_2.12 CD4017BE_2.13 CD4017BE_2.14 CD4017BE_2.15 CD4017BE_2.16 CD4017BE_3.1 CD4017BE_3.2 CD4017BE_3.3 CD4017BE_3.4 CD4017BE_3.5 CD4017BE_3.6 CD4017BE_3.7 CD4017BE_3.8 CD4017BE_3.9 CD4017BE_3.10 CD4017BE_3.11 CD4017BE_3.12 CD4017BE_3.13 CD4017BE_3.14 CD4017BE_3.15 CD4017BE_3.16 CD4017BE_4.1 CD4017BE_4.2 CD4017BE_4.3 CD4017BE_4.4 CD4017BE_4.5 CD4017BE_4.6 CD4017BE_4.7 CD4017BE_4.8 CD4017BE_4.9 CD4017BE_4.10 CD4017BE_4.11 CD4017BE_4.12 CD4017BE_4.13 CD4017BE_4.14 CD4017BE_4.15 CD4017BE_4.16 P1_1.1 P1_1.2 P1_2.1 P1_2.2 P1_3.1 P1_3.2 P1_4.1 P1_4.2
copper on no net: | length 4461.6
  Top Layer w0.508: 3.175,22.987 6.985,26.797 23.368,26.797 29.095,32.524 54.114,32.524 56.134,34.544 ; 3.175,42.672 6.985,46.482 23.368,46.482 29.095,52.209 54.114,52.209 56.134,54.229 ; 3.175,62.484 6.985,66.294 23.368,66.294 29.095,72.021 54.114,72.021 56.134,74.041 ; 3.175,82.423 6.985,86.233 23.368,86.233 29.095,91.96 54.114,91.96 56.134,93.98 ; 3.556,34.544 1.829,32.817 1.829,29.794 2.921,28.702 19.05,28.702 20.955,30.607 ; 3.556,54.229 1.829,52.502 1.829,49.479 2.921,48.387 19.05,48.387 20.955,50.292 ; 3.556,74.041 1.829,72.314 1.829,69.291 2.921,68.199 19.05,68.199 20.955,70.104 ; 3.556,93.98 1.829,92.253 1.829,89.23 2.921,88.138 19.05,88.138 20.955,90.043 ; 5.715,22.987 4.318,21.59 2.21,21.59 1.524,22.276 1.524,26.34 3.023,27.838 22.835,27.838 23.495,28.499 23.495,32.131 21.082,34.544 ; 5.715,42.672 4.318,41.275 2.21,41.275 1.524,41.961 1.524,46.025 3.023,47.523 22.835,47.523 23.495,48.184 23.495,51.816 21.082,54.229 ; 5.715,62.484 4.318,61.087 2.21,61.087 1.524,61.773 1.524,65.837 3.023,67.335 22.835,67.335 23.495,67.996 23.495,71.628 21.082,74.041 ; 5.715,82.423 4.318,81.026 2.21,81.026 1.524,81.712 1.524,85.776 3.023,87.274 22.835,87.274 23.495,87.935 23.495,91.567 21.082,93.98 ; 8.255,30.607 8.128,30.607 8.128,37.846 8.636,38.354 28.956,38.354 32.766,34.544 ; 8.255,50.292 8.128,50.292 8.128,57.531 8.636,58.039 28.956,58.039 32.766,54.229 ; 8.255,70.104 8.128,70.104 8.128,77.343 8.636,77.851 28.956,77.851 32.766,74.041 ; 8.255,90.043 8.128,90.043 8.128,97.282 8.636,97.79 28.956,97.79 32.766,93.98 ; 9.398,34.544 9.398,32.004 10.795,30.607 ; 9.398,54.229 9.398,51.689 10.795,50.292 ; 9.398,74.041 9.398,71.501 10.795,70.104 ; 9.398,93.98 9.398,91.44 10.795,90.043 ; 13.335,30.607 13.335,31.877 14.732,33.274 16.281,33.274 18.821,35.814 22.403,35.814 24.931,33.286 34.036,33.286 34.036,37.338 35.052,38.354 64.008,38.354 67.818,34.544 ; 13.335,50.292 13.335,51.562 14.732,52.959 16.281,52.959 18.821,55.499 22.403,55.499 24.931,52.971 34.036,52.971 34.036,57.023 35.052,58.039 64.008,58.039 67.818,54.229 ; 13.335,70.104 13.335,71.374 14.732,72.771 16.281,72.771 18.821,75.311 22.403,75.311 24.931,72.783 34.036,72.783 34.036,76.835 35.052,77.851 64.008,77.851 67.818,74.041 ; 13.335,90.043 13.335,91.313 14.732,92.71 16.281,92.71 18.821,95.25 22.403,95.25 24.931,92.722 34.036,92.722 34.036,96.774 35.052,97.79 64.008,97.79 67.818,93.98 ; 35.687,26.67 35.687,24.765 37.338,23.114 46.101,23.114 47.32,24.333 47.32,26.67 49.911,29.261 54.458,29.261 55.499,28.219 62.89,28.219 65.024,30.353 ; 35.687,46.355 35.687,44.45 37.338,42.799 46.101,42.799 47.32,44.018 47.32,46.355 49.911,48.946 54.458,48.946 55.499,47.904 62.89,47.904 65.024,50.038 ; 35.687,66.167 35.687,64.262 37.338,62.611 46.101,62.611 47.32,63.83 47.32,66.167 49.911,68.758 54.458,68.758 55.499,67.716 62.89,67.716 65.024,69.85 ; 35.687,86.106 35.687,84.201 37.338,82.55 46.101,82.55 47.32,83.769 47.32,86.106 49.911,88.697 54.458,88.697 55.499,87.655 62.89,87.655 65.024,89.789 ; 44.958,29.678 46.522,31.242 56.388,31.242 60.96,35.814 64.287,35.814 68.707,31.394 68.707,29.21 69.342,28.575 75.438,28.575 77.724,26.289 ; 44.958,49.363 46.522,50.927 56.388,50.927 60.96,55.499 64.287,55.499 68.707,51.079 68.707,48.895 69.342,48.26 75.438,48.26 77.724,45.974 ; 44.958,69.175 46.522,70.739 56.388,70.739 60.96,75.311 64.287,75.311 68.707,70.891 68.707,68.707 69.342,68.072 75.438,68.072 77.724,65.786 ; 44.958,89.114 46.522,90.678 56.388,90.678 60.96,95.25 64.287,95.25 68.707,90.83 68.707,88.646 69.342,88.011 75.438,88.011 77.724,85.725 ; 51.181,26.67 51.181,24.892 52.324,23.749 57.277,23.749 60.198,26.67 64.897,26.67 66.294,28.067 66.294,31.242 65.608,31.928 62.535,31.928 60.833,30.226 ; 51.181,46.355 51.181,44.577 52.324,43.434 57.277,43.434 60.198,46.355 64.897,46.355 66.294,47.752 66.294,50.927 65.608,51.613 62.535,51.613 60.833,49.911 ; 51.181,66.167 51.181,64.389 52.324,63.246 57.277,63.246 60.198,66.167 64.897,66.167 66.294,67.564 66.294,70.739 65.608,71.425 62.535,71.425 60.833,69.723 ; 51.181,86.106 51.181,84.328 52.324,83.185 57.277,83.185 60.198,86.106 64.897,86.106 66.294,87.503 66.294,90.678 65.608,91.364 62.535,91.364 60.833,89.662 ; 67.818,37.084 69.977,34.925 69.977,29.845 ; 67.818,56.769 69.977,54.61 69.977,49.53 ; 67.818,76.581 69.977,74.422 69.977,69.342 ; 67.818,96.52 69.977,94.361 69.977,89.281 ; 70.104,22.987 71.414,24.297 86.447,24.297 ; 70.104,42.672 71.414,43.982 86.447,43.982 ; 70.104,62.484 71.414,63.794 86.447,63.794 ; 70.104,82.423 71.414,83.733 86.447,83.733 ; 81.447,26.797 83.947,29.297 86.447,29.297 ; 81.447,46.482 83.947,48.982 86.447,48.982 ; 81.447,66.294 83.947,68.794 86.447,68.794 ; 81.447,86.233 83.947,88.733 86.447,88.733 ; 98.806,27.178 99.718,26.266 99.718,22.987 ; 98.806,46.863 99.718,45.951 99.718,42.672 ; 98.806,66.675 99.718,65.763 99.718,62.484 ; 98.806,86.614 99.718,85.702 99.718,82.423
  Bottom Layer w0.508: 3.175,30.607 6.985,26.797 9.525,26.797 13.335,22.987 14.681,21.641 17.069,21.641 18.415,22.987 19.761,24.333 26.67,24.333 28.016,22.987 35.179,22.987 37.592,25.4 39.675,23.317 47.981,23.317 48.793,24.13 51.816,24.13 53.086,25.4 66.687,25.4 68.834,27.547 70.954,27.547 71.374,27.127 74.422,27.127 76.53,25.019 81.585,25.019 82.728,26.162 82.728,28.169 ; 3.175,50.292 6.985,46.482 9.525,46.482 13.335,42.672 14.681,41.326 17.069,41.326 18.415,42.672 19.761,44.018 26.67,44.018 28.016,42.672 35.179,42.672 37.592,45.085 39.675,43.002 47.981,43.002 48.793,43.815 51.816,43.815 53.086,45.085 66.687,45.085 68.834,47.232 70.954,47.232 71.374,46.812 74.422,46.812 76.53,44.704 81.585,44.704 82.728,45.847 82.728,47.854 ; 3.175,70.104 6.985,66.294 9.525,66.294 13.335,62.484 14.681,61.138 17.069,61.138 18.415,62.484 19.761,63.83 26.67,63.83 28.016,62.484 35.179,62.484 37.592,64.897 39.675,62.814 47.981,62.814 48.793,63.627 51.816,63.627 53.086,64.897 66.687,64.897 68.834,67.044 70.954,67.044 71.374,66.624 74.422,66.624 76.53,64.516 81.585,64.516 82.728,65.659 82.728,67.666 ; 3.175,90.043 6.985,86.233 9.525,86.233 13.335,82.423 14.681,81.077 17.069,81.077 18.415,82.423 19.761,83.769 26.67,83.769 28.016,82.423 35.179,82.423 37.592,84.836 39.675,82.753 47.981,82.753 48.793,83.566 51.816,83.566 53.086,84.836 66.687,84.836 68.834,86.983 70.954,86.983 71.374,86.563 74.422,86.563 76.53,84.455 81.585,84.455 82.728,85.598 82.728,87.605 ; 3.556,37.084 9.398,37.084 15.24,37.084 21.082,37.084 26.924,37.084 32.766,37.084 38.608,37.084 44.45,37.084 50.292,37.084 56.134,37.084 61.976,37.084 67.818,37.084 73.66,37.084 79.502,37.084 85.344,37.084 91.186,37.084 97.028,37.084 ; 3.556,56.769 9.398,56.769 15.24,56.769 21.082,56.769 26.924,56.769 32.766,56.769 38.608,56.769 44.45,56.769 50.292,56.769 56.134,56.769 61.976,56.769 67.818,56.769 73.66,56.769 79.502,56.769 85.344,56.769 91.186,56.769 97.028,56.769 ; 3.556,76.581 9.398,76.581 15.24,76.581 21.082,76.581 26.924,76.581 32.766,76.581 38.608,76.581 44.45,76.581 50.292,76.581 56.134,76.581 61.976,76.581 67.818,76.581 73.66,76.581 79.502,76.581 85.344,76.581 91.186,76.581 97.028,76.581 ; 3.556,96.52 9.398,96.52 15.24,96.52 21.082,96.52 26.924,96.52 32.766,96.52 38.608,96.52 44.45,96.52 50.292,96.52 56.134,96.52 61.976,96.52 67.818,96.52 73.66,96.52 79.502,96.52 85.344,96.52 91.186,96.52 97.028,96.52 ; 5.715,30.607 7.95,32.842 16.51,32.842 19.482,35.814 43.18,35.814 44.45,34.544 50.292,34.544 ; 5.715,50.292 7.95,52.527 16.51,52.527 19.482,55.499 43.18,55.499 44.45,54.229 50.292,54.229 ; 5.715,70.104 7.95,72.339 16.51,72.339 19.482,75.311 43.18,75.311 44.45,74.041 50.292,74.041 ; 5.715,90.043 7.95,92.278 16.51,92.278 19.482,95.25 43.18,95.25 44.45,93.98 50.292,93.98 ; 8.255,22.987 1.829,29.413 1.829,37.262 2.921,38.354 97.663,38.354 98.552,37.465 98.552,36.576 97.79,35.814 86.614,35.814 85.344,34.544 79.502,34.544 ; 8.255,42.672 1.829,49.098 1.829,56.947 2.921,58.039 97.663,58.039 98.552,57.15 98.552,56.261 97.79,55.499 86.614,55.499 85.344,54.229 79.502,54.229 ; 8.255,62.484 1.829,68.91 1.829,76.759 2.921,77.851 97.663,77.851 98.552,76.962 98.552,76.073 97.79,75.311 86.614,75.311 85.344,74.041 79.502,74.041 ; 8.255,82.423 1.829,88.849 1.829,96.698 2.921,97.79 97.663,97.79 98.552,96.901 98.552,96.012 97.79,95.25 86.614,95.25 85.344,93.98 79.502,93.98 ; 9.398,34.544 15.24,34.544 ; 9.398,54.229 15.24,54.229 ; 9.398,74.041 15.24,74.041 ; 9.398,93.98 15.24,93.98 ; 15.875,22.987 18.771,25.883 27.497,25.883 29.21,24.17 33.187,24.17 35.687,26.67 ; 15.875,30.607 18.364,33.096 87.097,33.096 88.544,34.544 91.186,34.544 ; 15.875,42.672 18.771,45.568 27.497,45.568 29.21,43.855 33.187,43.855 35.687,46.355 ; 15.875,50.292 18.364,52.781 87.097,52.781 88.544,54.229 91.186,54.229 ; 15.875,62.484 18.771,65.38 27.497,65.38 29.21,63.667 33.187,63.667 35.687,66.167 ; 15.875,70.104 18.364,72.593 87.097,72.593 88.544,74.041 91.186,74.041 ; 15.875,82.423 18.771,85.319 27.497,85.319 29.21,83.606 33.187,83.606 35.687,86.106 ; 15.875,90.043 18.364,92.532 87.097,92.532 88.544,93.98 91.186,93.98 ; 18.415,30.607 19.761,31.953 88.697,31.953 89.611,32.868 95.352,32.868 97.028,34.544 ; 18.415,50.292 19.761,51.638 88.697,51.638 89.611,52.553 95.352,52.553 97.028,54.229 ; 18.415,70.104 19.761,71.45 88.697,71.45 89.611,72.365 95.352,72.365 97.028,74.041 ; 18.415,90.043 19.761,91.389 88.697,91.389 89.611,92.304 95.352,92.304 97.028,93.98 ; 20.955,22.987 21.717,22.225 47.879,22.225 48.26,22.606 60.833,22.606 64.897,22.606 65.024,22.733 66.548,22.733 70.104,26.289 73.406,22.987 77.724,22.987 89.258,22.987 92.6,26.329 92.71,26.329 ; 20.955,42.672 21.717,41.91 47.879,41.91 48.26,42.291 60.833,42.291 64.897,42.291 65.024,42.418 66.548,42.418 70.104,45.974 73.406,42.672 77.724,42.672 89.258,42.672 92.6,46.014 92.71,46.014 ; 20.955,62.484 21.717,61.722 47.879,61.722 48.26,62.103 60.833,62.103 64.897,62.103 65.024,62.23 66.548,62.23 70.104,65.786 73.406,62.484 77.724,62.484 89.258,62.484 92.6,65.826 92.71,65.826 ; 20.955,82.423 21.717,81.661 47.879,81.661 48.26,82.042 60.833,82.042 64.897,82.042 65.024,82.169 66.548,82.169 70.104,85.725 73.406,82.423 77.724,82.423 89.258,82.423 92.6,85.765 92.71,85.765 ; 21.082,34.544 26.924,34.544 ; 21.082,54.229 26.924,54.229 ; 21.082,74.041 26.924,74.041 ; 21.082,93.98 26.924,93.98 ; 29.21,29.17 30.977,30.937 50.089,30.937 53.086,27.94 67.779,27.94 68.148,28.309 71.755,28.309 72.124,27.94 80.304,27.94 81.447,26.797 ; 29.21,48.855 30.977,50.622 50.089,50.622 53.086,47.625 67.779,47.625 68.148,47.994 71.755,47.994 72.124,47.625 80.304,47.625 81.447,46.482 ; 29.21,68.667 30.977,70.434 50.089,70.434 53.086,67.437 67.779,67.437 68.148,67.806 71.755,67.806 72.124,67.437 80.304,67.437 81.447,66.294 ; 29.21,88.606 30.977,90.373 50.089,90.373 53.086,87.376 67.779,87.376 68.148,87.745 71.755,87.745 72.124,87.376 80.304,87.376 81.447,86.233 ; 32.766,34.544 38.608,34.544 ; 32.766,54.229 38.608,54.229 ; 32.766,74.041 38.608,74.041 ; 32.766,93.98 38.608,93.98 ; 37.592,27.94 43.22,27.94 44.958,29.678 ; 37.592,47.625 43.22,47.625 44.958,49.363 ; 37.592,67.437 43.22,67.437 44.958,69.175 ; 37.592,87.376 43.22,87.376 44.958,89.114 ; 44.958,24.678 46.95,26.67 51.181,26.67 ; 44.958,44.363 46.95,46.355 51.181,46.355 ; 44.958,64.175 46.95,66.167 51.181,66.167 ; 44.958,84.114 46.95,86.106 51.181,86.106 ; 56.134,34.544 61.976,34.544 ; 56.134,54.229 61.976,54.229 ; 56.134,74.041 61.976,74.041 ; 56.134,93.98 61.976,93.98 ; 67.818,34.544 73.66,34.544 ; 67.818,54.229 73.66,54.229 ; 67.818,74.041 73.66,74.041 ; 67.818,93.98 73.66,93.98 ; 77.597,29.845 81.051,29.845 82.728,28.169 ; 77.597,49.53 81.051,49.53 82.728,47.854 ; 77.597,69.342 81.051,69.342 82.728,67.666 ; 77.597,89.281 81.051,89.281 82.728,87.605 ; 98.806,29.718 94.321,29.718 92.71,31.329 89.321,27.94 82.956,27.94 82.728,28.169 ; 98.806,49.403 94.321,49.403 92.71,51.014 89.321,47.625 82.956,47.625 82.728,47.854 ; 98.806,69.215 94.321,69.215 92.71,70.826 89.321,67.437 82.956,67.437 82.728,67.666 ; 98.806,89.154 94.321,89.154 92.71,90.765 89.321,87.376 82.956,87.376 82.728,87.605

## Keep-outs
Keep-Out Layer:
  the board outline again, w0.254

## Silkscreen, mask and mechanical layers (free items; w line width, h text height)
Top Overlay:
  lines w0.254: 21.844,6.371 cw(c21.844,7.112) 21.844,7.853 ; 21.844,26.056 cw(c21.844,26.797) 21.844,27.538 ; 21.844,45.741 cw(c21.844,46.482) 21.844,47.223 ; 21.844,65.553 cw(c21.844,66.294) 21.844,67.035 ; 21.844,85.492 cw(c21.844,86.233) 21.844,86.974 ; 0.889,0.762 101.346,0.762 101.346,19.304 0.889,19.304 0.889,0.762 ; 0.889,40.132 0.889,58.674 101.346,58.674 101.346,40.132 0.889,40.132 ; 0.889,59.944 0.889,78.486 101.346,78.486 101.346,59.944 0.889,59.944 ; 1.016,20.447 1.016,38.989 101.346,38.989 101.346,20.447 1.016,20.447 ; 1.016,79.883 1.016,98.425 101.346,98.425 101.346,79.883 1.016,79.883
  text "-" at 1.524,95.631 h1.52
  text "-" at 7.366,95.631 h1.52
  text "-" at 13.208,95.631 h1.52
  text "-" at 19.05,95.631 h1.52
  text "-" at 24.892,95.631 h1.52
  text "-" at 30.734,95.631 h1.52
  text "-" at 36.576,95.631 h1.52
  text "-" at 42.418,95.631 h1.52
  text "-" at 48.26,95.631 h1.52
  text "-" at 54.102,95.631 h1.52
  text "-" at 59.944,95.631 h1.52
  text "-" at 65.786,95.631 h1.52
  text "-" at 71.628,95.631 h1.52
  text "-" at 77.47,95.631 h1.52
  text "-" at 83.312,95.631 h1.52
  text "-" at 89.154,95.631 h1.52
  text "-" at 94.996,95.631 h1.52
  text "+" at 1.397,93.472 h1.52
  text "+" at 7.366,93.472 h1.52
  text "+" at 13.208,93.472 h1.52
  text "+" at 19.05,93.472 h1.52
  text "+" at 24.765,93.472 h1.52
  text "+" at 30.607,93.472 h1.52
  text "+" at 36.576,93.472 h1.52
  text "+" at 42.418,93.472 h1.52
  text "+" at 48.26,93.472 h1.52
  text "+" at 54.102,93.472 h1.52
  text "+" at 59.944,93.472 h1.52
  text "+" at 65.786,93.472 h1.52
  text "+" at 71.628,93.472 h1.52
  text "+" at 77.47,93.472 h1.52
  text "+" at 83.185,93.472 h1.52
  text "+" at 89.154,93.472 h1.52
  text "+" at 94.869,93.472 h1.52
  text "-" at 90.678,90.17 h1.52
  text "C828" at 34.925,89.281 h1.52
  text "C828" at 50.292,89.154 h1.52
  text "100" at 72.517,88.773 h1
  text "-" at 100.33,88.519 h1.52
  text "-" at 42.926,88.392 h1.52
  text "-" at 26.924,87.757 h1.52
  text "220u" at 90.297,86.36 h1 r90
  text "2.2u" at 43.307,86.233 h0.95
  text "9V" at 97.155,86.106 h2 r90
  text "+" at 100.33,85.979 h1.52
  text "2.2u" at 27.559,85.598 h0.95
  text "CD4017" at 6.985,85.217 h1.6
  text "18K" at 72.39,85.217 h1
  text "+" at 90.551,84.836 h1.52
  text "220" at 61.341,84.582 h1 r90
  text "220" at 65.532,84.582 h1 r90
  text "1N4001" at 93.599,84.074 h1
  text "50K / PRESET" at 80.137,83.82 h1
  text "+" at 42.672,83.312 h1.52
  text "+" at 27.051,82.677 h1.52
  text "1.8K" at 72.263,81.915 h1
  text "17 LED KNIGHT RIDER" at 23.876,80.518 h1.9
  text "A.I. PCB" at 1.651,80.264 h1.4
  text "-" at 88.646,80.264 h1.52
  text "+" at 99.06,79.883 h1.52
  text "-" at 1.524,75.692 h1.52
  text "-" at 7.366,75.692 h1.52
  text "-" at 13.208,75.692 h1.52
  text "-" at 19.05,75.692 h1.52
  text "-" at 24.892,75.692 h1.52
  text "-" at 30.734,75.692 h1.52
  text "-" at 36.576,75.692 h1.52
  text "-" at 42.418,75.692 h1.52
  text "-" at 48.26,75.692 h1.52
  text "-" at 54.102,75.692 h1.52
  text "-" at 59.944,75.692 h1.52
  text "-" at 65.786,75.692 h1.52
  text "-" at 71.628,75.692 h1.52
  text "-" at 77.47,75.692 h1.52
  text "-" at 83.312,75.692 h1.52
  text "-" at 89.154,75.692 h1.52
  text "-" at 94.996,75.692 h1.52
  text "+" at 1.397,73.533 h1.52
  text "+" at 7.366,73.533 h1.52
  text "+" at 13.208,73.533 h1.52
  text "+" at 19.05,73.533 h1.52
  text "+" at 24.765,73.533 h1.52
  text "+" at 30.607,73.533 h1.52
  text "+" at 36.576,73.533 h1.52
  text "+" at 42.418,73.533 h1.52
  text "+" at 48.26,73.533 h1.52
  text "+" at 54.102,73.533 h1.52
  text "+" at 59.944,73.533 h1.52
  text "+" at 65.786,73.533 h1.52
  text "+" at 71.628,73.533 h1.52
  text "+" at 77.47,73.533 h1.52
  text "+" at 83.185,73.533 h1.52
  text "+" at 89.154,73.533 h1.52
  text "+" at 94.869,73.533 h1.52
  text "-" at 90.678,70.231 h1.52
  text "C828" at 34.925,69.342 h1.52
  text "C828" at 50.292,69.215 h1.52
  text "100" at 72.517,68.834 h1
  text "-" at 100.33,68.58 h1.52
  text "-" at 42.926,68.453 h1.52
  text "-" at 26.924,67.818 h1.52
  text "220u" at 90.297,66.421 h1 r90
  text "2.2u" at 43.307,66.294 h0.95
  text "9V" at 97.155,66.167 h2 r90
  text "+" at 100.33,66.04 h1.52
  text "2.2u" at 27.559,65.659 h0.95
  text "CD4017" at 6.985,65.278 h1.6
  text "18K" at 72.39,65.278 h1
  text "+" at 90.551,64.897 h1.52
  text "220" at 61.341,64.643 h1 r90
  text "220" at 65.532,64.643 h1 r90
  text "1N4001" at 93.599,64.135 h1
  text "50K / PRESET" at 80.137,63.881 h1
  text "+" at 42.672,63.373 h1.52
  text "+" at 27.051,62.738 h1.52
  text "1.8K" at 72.263,61.976 h1
  text "17 LED KNIGHT RIDER" at 23.876,60.579 h1.9
  text "A.I. PCB" at 1.651,60.325 h1.4
  text "-" at 88.646,60.325 h1.52
  text "+" at 99.06,59.944 h1.52
  text "-" at 1.524,55.88 h1.52
  text "-" at 7.366,55.88 h1.52
  text "-" at 13.208,55.88 h1.52
  text "-" at 19.05,55.88 h1.52
  text "-" at 24.892,55.88 h1.52
  text "-" at 30.734,55.88 h1.52
  text "-" at 36.576,55.88 h1.52
  text "-" at 42.418,55.88 h1.52
  text "-" at 48.26,55.88 h1.52
  text "-" at 54.102,55.88 h1.52
  text "-" at 59.944,55.88 h1.52
  text "-" at 65.786,55.88 h1.52
  text "-" at 71.628,55.88 h1.52
  text "-" at 77.47,55.88 h1.52
  text "-" at 83.312,55.88 h1.52
  text "-" at 89.154,55.88 h1.52
  text "-" at 94.996,55.88 h1.52
  text "+" at 1.397,53.721 h1.52
  text "+" at 7.366,53.721 h1.52
  text "+" at 13.208,53.721 h1.52
  text "+" at 19.05,53.721 h1.52
  text "+" at 24.765,53.721 h1.52
  text "+" at 30.607,53.721 h1.52
  text "+" at 36.576,53.721 h1.52
  text "+" at 42.418,53.721 h1.52
  text "+" at 48.26,53.721 h1.52
  text "+" at 54.102,53.721 h1.52
  text "+" at 59.944,53.721 h1.52
  text "+" at 65.786,53.721 h1.52
  text "+" at 71.628,53.721 h1.52
  text "+" at 77.47,53.721 h1.52
  text "+" at 83.185,53.721 h1.52
  text "+" at 89.154,53.721 h1.52
  text "+" at 94.869,53.721 h1.52
  text "-" at 90.678,50.419 h1.52
  text "C828" at 34.925,49.53 h1.52
  text "C828" at 50.292,49.403 h1.52
  text "100" at 72.517,49.022 h1
  text "-" at 100.33,48.768 h1.52
  text "-" at 42.926,48.641 h1.52
  text "-" at 26.924,48.006 h1.52
  text "220u" at 90.297,46.609 h1 r90
  text "2.2u" at 43.307,46.482 h0.95
  text "9V" at 97.155,46.355 h2 r90
  text "+" at 100.33,46.228 h1.52
  text "2.2u" at 27.559,45.847 h0.95
  text "CD4017" at 6.985,45.466 h1.6
  text "18K" at 72.39,45.466 h1
  text "+" at 90.551,45.085 h1.52
  text "220" at 61.341,44.831 h1 r90
  text "220" at 65.532,44.831 h1 r90
  text "1N4001" at 93.599,44.323 h1
  text "50K / PRESET" at 80.137,44.069 h1
  text "+" at 42.672,43.561 h1.52
  text "+" at 27.051,42.926 h1.52
  text "1.8K" at 72.263,42.164 h1
  text "17 LED KNIGHT RIDER" at 23.876,40.767 h1.9
  text "A.I. PCB" at 1.651,40.513 h1.4
  text "-" at 88.646,40.513 h1.52
  text "+" at 99.06,40.132 h1.52
  text "-" at 1.524,36.195 h1.52
  text "-" at 7.366,36.195 h1.52
  text "-" at 13.208,36.195 h1.52
  text "-" at 19.05,36.195 h1.52
  text "-" at 24.892,36.195 h1.52
  text "-" at 30.734,36.195 h1.52
  text "-" at 36.576,36.195 h1.52
  text "-" at 42.418,36.195 h1.52
  text "-" at 48.26,36.195 h1.52
  text "-" at 54.102,36.195 h1.52
  text "-" at 59.944,36.195 h1.52
  text "-" at 65.786,36.195 h1.52
  text "-" at 71.628,36.195 h1.52
  text "-" at 77.47,36.195 h1.52
  text "-" at 83.312,36.195 h1.52
  text "-" at 89.154,36.195 h1.52
  text "-" at 94.996,36.195 h1.52
  text "+" at 1.397,34.036 h1.52
  text "+" at 7.366,34.036 h1.52
  text "+" at 13.208,34.036 h1.52
  text "+" at 19.05,34.036 h1.52
  text "+" at 24.765,34.036 h1.52
  text "+" at 30.607,34.036 h1.52
  text "+" at 36.576,34.036 h1.52
  text "+" at 42.418,34.036 h1.52
  text "+" at 48.26,34.036 h1.52
  text "+" at 54.102,34.036 h1.52
  text "+" at 59.944,34.036 h1.52
  text "+" at 65.786,34.036 h1.52
  text "+" at 71.628,34.036 h1.52
  text "+" at 77.47,34.036 h1.52
  text "+" at 83.185,34.036 h1.52
  text "+" at 89.154,34.036 h1.52
  text "+" at 94.869,34.036 h1.52
  text "-" at 90.678,30.734 h1.52
  text "C828" at 34.925,29.845 h1.52
  text "C828" at 50.292,29.718 h1.52
  text "100" at 72.517,29.337 h1
  text "-" at 100.33,29.083 h1.52
  text "-" at 42.926,28.956 h1.52
  text "-" at 26.924,28.321 h1.52
  text "220u" at 90.297,26.924 h1 r90
  text "2.2u" at 43.307,26.797 h0.95
  text "9V" at 97.155,26.67 h2 r90
  text "+" at 100.33,26.543 h1.52
  text "2.2u" at 27.559,26.162 h0.95
  text "CD4017" at 6.985,25.781 h1.6
  text "18K" at 72.39,25.781 h1
  text "+" at 90.551,25.4 h1.52
  text "220" at 61.341,25.146 h1 r90
  text "220" at 65.532,25.146 h1 r90
  text "1N4001" at 93.599,24.638 h1
  text "50K / PRESET" at 80.137,24.384 h1
  text "+" at 42.672,23.876 h1.52
  text "+" at 27.051,23.241 h1.52
  text "1.8K" at 72.263,22.479 h1
  text "17 LED KNIGHT RIDER" at 23.876,21.082 h1.9
  text "A.I. PCB" at 1.651,20.828 h1.4
  text "-" at 88.646,20.828 h1.52
  text "+" at 99.06,20.447 h1.52
  text "-" at 1.524,16.51 h1.52
  text "-" at 7.366,16.51 h1.52
  text "-" at 13.208,16.51 h1.52
  text "-" at 19.05,16.51 h1.52
  text "-" at 24.892,16.51 h1.52
  text "-" at 30.734,16.51 h1.52
  text "-" at 36.576,16.51 h1.52
  text "-" at 42.418,16.51 h1.52
  text "-" at 48.26,16.51 h1.52
  text "-" at 54.102,16.51 h1.52
  text "-" at 59.944,16.51 h1.52
  text "-" at 65.786,16.51 h1.52
  text "-" at 71.628,16.51 h1.52
  text "-" at 77.47,16.51 h1.52
  text "-" at 83.312,16.51 h1.52
  text "-" at 89.154,16.51 h1.52
  text "-" at 94.996,16.51 h1.52
  text "+" at 1.397,14.351 h1.52
  text "+" at 7.366,14.351 h1.52
  text "+" at 13.208,14.351 h1.52
  text "+" at 19.05,14.351 h1.52
  text "+" at 24.765,14.351 h1.52
  text "+" at 30.607,14.351 h1.52
  text "+" at 36.576,14.351 h1.52
  text "+" at 42.418,14.351 h1.52
  text "+" at 48.26,14.351 h1.52
  text "+" at 54.102,14.351 h1.52
  text "+" at 59.944,14.351 h1.52
  text "+" at 65.786,14.351 h1.52
  text "+" at 71.628,14.351 h1.52
  text "+" at 77.47,14.351 h1.52
  text "+" at 83.185,14.351 h1.52
  text "+" at 89.154,14.351 h1.52
  text "+" at 94.869,14.351 h1.52
  text "-" at 90.678,11.049 h1.52
  text "C828" at 34.925,10.16 h1.52
  text "C828" at 50.292,10.033 h1.52
  text "100" at 72.517,9.652 h1
  text "-" at 100.33,9.398 h1.52
  text "-" at 42.926,9.271 h1.52
  text "-" at 26.924,8.636 h1.52
  text "220u" at 90.297,7.239 h1 r90
  text "2.2u" at 43.307,7.112 h0.95
  text "9V" at 97.155,6.985 h2 r90
  text "+" at 100.33,6.858 h1.52
  text "2.2u" at 27.559,6.477 h0.95
  text "CD4017" at 6.985,6.096 h1.6
  text "18K" at 72.39,6.096 h1
  text "+" at 90.551,5.715 h1.52
  text "220" at 61.341,5.461 h1 r90
  text "220" at 65.532,5.461 h1 r90
  text "1N4001" at 93.599,4.953 h1
  text "50K / PRESET" at 80.137,4.699 h1
  text "+" at 42.672,4.191 h1.52
  text "+" at 27.051,3.556 h1.52
  text "1.8K" at 72.263,2.794 h1
  text "17 LED KNIGHT RIDER" at 23.876,1.397 h1.9
  text "A.I. PCB" at 1.651,1.143 h1.4
  text "-" at 88.646,1.143 h1.52
  text "+" at 99.06,0.762 h1.52
Bottom Overlay:
  text "17 LED KNIGHT RIDER" at 57.912,80.518 h1.9
  text "A.I. PCB" at 12.192,80.137 h1.4
  text "17 LED KNIGHT RIDER" at 57.912,60.579 h1.9
  text "A.I. PCB" at 12.192,60.198 h1.4
  text "17 LED KNIGHT RIDER" at 57.912,40.767 h1.9
  text "A.I. PCB" at 12.192,40.386 h1.4
  text "17 LED KNIGHT RIDER" at 57.912,21.082 h1.9
  text "A.I. PCB" at 12.192,20.701 h1.4
  text "17 LED KNIGHT RIDER" at 57.912,1.397 h1.9
  text "A.I. PCB" at 12.192,1.016 h1.4